# Altium PCB sigjumper-bottom.PcbDoc (part 3 of 5)
Units mil, origin at the board's own origin, x right, y up, seen from the top; angles counter-clockwise.
Board outline 7874.02 x 2559.06 mil, 14 copper layers (TOP, P1(GND), S1(V), P2(GND), S2(H), P3(GND), S3(V12/V2V5), S4(VDDR), P4(GND), S5(V), P5(GND), S6(H), P6(GND), BOT), stack 115.1 mil thick; 22 components, 186 nets, 824 pads, 732 vias.
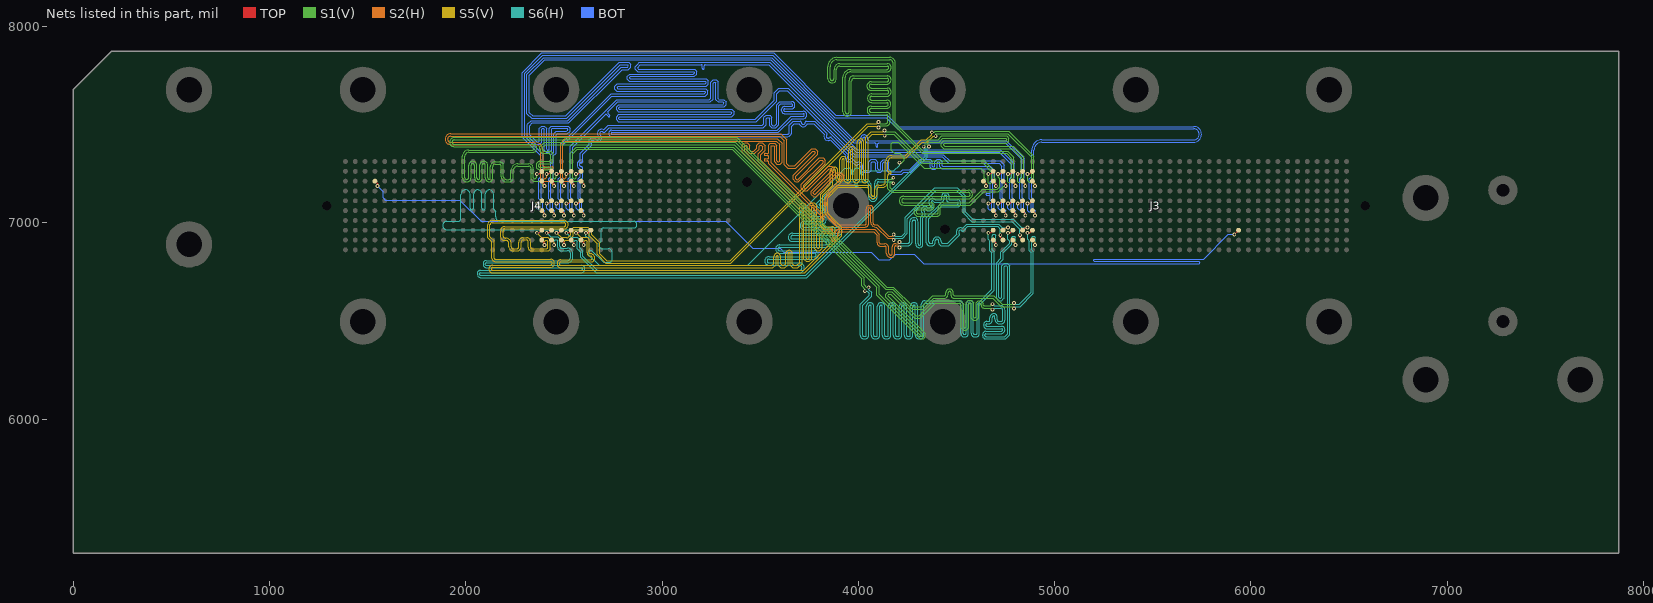
[diagram p15: the nets of this part, all layers, seen from the top]

## Via types
v1: diameter 19, hole 10, TOP to BOT, tented both sides, 732 vias

## Nets (pads, with @x,y where several pads share a name; then routed paths per layer and width w, separated by ;. In a path a pad name is that pad's centre, name@x,y a point inside that pad or via, vN(x,y) a via of type N, cw(c..) or ccw(c..) an arc to the next point about the centre after c; other vN are vias at no path point) (continued)
IL0.TB.G13.D6: J3.118 J4.38 | length 5779.3
  TOP w4: J4.38@1537.2,7211.61 1550.7,7198.11 v1(1550.7,7186.61) ; v1(5915.2,6940) J3.118@5936.81,6961.61
  BOT w4: v1(1550.7,7186.61) 1578.74,7158.58 1578.74,7126.81 1590.55,7115 1970,7115 2078,7007 3323.88,7007 3461.88,6869 3601,6869 3621,6849 4066,6849 4105,6810 4160,6810 4190,6840 4285,6840 4334,6791 5736,6791 5739.17,6794.17 5739.17,6797.24 5733.42,6803 5201.92,6803 5199.8,6805.12 5199.8,6812.01 5201.77,6813.98 5758.98,6813.98 5885,6940 v1(5915.2,6940)
IL1.LR.G0.D0_N: J3.323 J4.203 | length 5847.7
  TOP w4: v1(2362.2,6948.11) 2373.7,6948.11 J4.203@2387.2,6961.61 ; J3.323@4886.81,7211.61 4900.31,7198.11 v1(4900.31,7186.61)
  S1(V) w4: v1(4374,7460.31) 4385.31,7460.31 4391,7466 4765.97,7466 4894.29,7337.68 4894.29,7204.14 4900.31,7198.11 v1(4900.31,7186.61)
  S5(V) w4: v1(2362.2,6948.11) 2385.59,6924.73 2417.91,6924.73 2429.91,6912.73 2429.91,6869.03 cw(c2416.88,6869.03) 2416.88,6856 2336,6856 cw(c2336,6874) 2318,6874 2318,6904 ccw(c2310,6904) 2310,6912 2293,6912 ccw(c2293,6901) 2282,6901 2282,6877 cw(c2261,6877) 2261,6856 2241,6856 cw(c2241,6878) 2219,6878 2219,6895 ccw(c2204,6895) 2204,6910 2195.03,6910 cw(c2195.03,6927.03) 2178,6927.03 2178,6960 cw(c2198,6960) 2198,6980 2500,6980 ccw(c2500,6990) 2510,6990 ccw(c2500,6990) 2500,7000 2135,7000 ccw(c2135,6988.49) 2123.49,6988.49 2123.49,6928.49 2145,6906.97 2145,6820 ccw(c2151,6820) 2151,6814 2432,6814 cw(c2432,6794) 2452,6794 cw(c2430,6794) 2430,6772 2138,6772 ccw(c2138,6764) 2130,6764 ccw(c2137,6764) 2137,6757 3721.38,6757 3903,6938.62 3903,6971.71 3831.71,7043 3831.71,7130.23 3893.39,7191.91 4050,7191.91 cw(c4050,7176.91) 4065,7176.91 4065,7145 ccw(c4075,7145) 4075,7135 ccw(c4075,7143) 4083,7143 4083,7169.91 cw(c4105,7169.91) 4105,7191.91 4120,7191.91 ccw(c4120,7209.91) 4138,7209.91 ; 4138,7208 4138,7310 cw(c4170,7310) 4170,7342 4240.03,7342 4320.03,7422 4347,7422 4374,7449 v1(4374,7460.31)
IL1.LR.G0.D0_P: J3.322 J4.202 | length 5846.8
  TOP w4: J4.202@2387.2,6911.61 2400.7,6898.11 v1(2400.7,6886.61) ; v1(4861.81,7248.11) 4873.31,7248.11 J3.322@4886.81,7261.61
  S1(V) w4: v1(4393.8,7440.51) 4393.8,7451.83 4395.97,7454 4761,7454 4882.29,7332.71 4882.29,7209.29 4878,7205 4870,7205 4861.81,7213.19 v1(4861.81,7248.11)
  S5(V) w4: v1(2400.7,6886.61) 2400.7,6902.52 2407.91,6909.73 2412.91,6909.73 2417.91,6904.73 2417.91,6874 cw(c2411.91,6874) 2411.91,6868 2336,6868 cw(c2336,6874) 2330,6874 2330,6904 ccw(c2310,6904) 2310,6924 2293,6924 ccw(c2293,6901) 2270,6901 2270,6877 cw(c2261,6877) 2261,6868 2241,6868 cw(c2241,6878) 2231,6878 2231,6895 ccw(c2204,6895) 2204,6922 2200,6922 cw(c2200,6932) 2190,6932 2190,6960 cw(c2198,6960) 2198,6968 2500,6968 ccw(c2500,6990) 2522,6990 ccw(c2500,6990) 2500,7012 2135,7012 ccw(c2135,6988.49) 2111.49,6988.49 2111.49,6923.51 2115,6920 2133,6902 2133,6820 ccw(c2151,6820) 2151,6802 2432,6802 cw(c2432,6794) 2440,6794 cw(c2430,6794) 2430,6784 2138,6784 ccw(c2138,6764) 2118,6764 ccw(c2137,6764) 2137,6745 3726.35,6745 3915,6933.65 3915,6976.68 3843.71,7047.97 3843.71,7125.26 3898.36,7179.91 4045.03,7179.91 cw(c4045.03,7171.94) 4053,7171.94 4053,7145 ccw(c4075,7145) 4075,7123 ccw(c4075,7143) 4095,7143 4095,7169.91 cw(c4105,7169.91) 4105,7179.91 4120,7179.91 ccw(c4120,7209.91) 4150,7209.91 ; 4150,7208 4150,7240 cw(c4160,7240) 4160,7250 4162,7250 ccw(c4162,7255) 4167,7255 ccw(c4162,7255) 4162,7260 4155,7260 cw(c4155,7265) 4150,7265 4150,7310 cw(c4170,7310) 4170,7330 4245,7330 4325,7410 4351.97,7410 4382.49,7440.51 v1(4393.8,7440.51)
IL1.LR.G0.D1_N: J3.326 J4.206 | length 5775.1
  TOP w4: v1(2362.2,7098.11) 2373.7,7098.11 J4.206@2387.2,7111.61 ; J3.326@4886.81,7061.61 4900.31,7048.11 v1(4900.31,7036.61)
  BOT w4: v1(2362.2,7098.11) 2362.2,7072.8 2370,7065 2375,7065 2380,7070 2380,7115 2372,7123 2372,7223.97 2383,7234.97 2383,7340.03 2288,7435.03 2288,7764.97 2388.03,7865 3567.88,7865 3885.88,7547 4148,7547 4205,7490 5708,7490 cw(c5708,7450) 5748,7450 cw(c5708,7450) 5708,7410 4935.09,7410 ccw(c4935.09,7369.52) 4894.61,7369.52 4894.61,7230 4883.61,7219 4883.61,7127.97 4891.61,7119.97 4891.61,7070 4900.31,7061.3 v1(4900.31,7036.61)
IL1.LR.G0.D1_P: J3.325 J4.205 | length 5757.9
  TOP w4: J4.205@2387.2,7061.61 2400.7,7048.11 v1(2400.7,7036.61) ; v1(4861.81,7098.11) 4873.31,7098.11 J3.325@4886.81,7111.61
  BOT w4: v1(2400.7,7036.61) 2400.7,7061.3 2392,7070 2392,7119.97 2384,7127.97 2384,7219 2395,7230 2395,7345 2300,7440 2300,7760 2393,7853 3562.91,7853 3880.91,7535 4143.03,7535 4200.03,7478 5708,7478 cw(c5708,7450) 5736,7450 cw(c5708,7450) 5708,7422 4935.1,7422 ccw(c4935.1,7369.5) 4882.61,7369.5 4882.61,7234.97 4871.61,7223.97 4871.61,7123 4879.61,7115 4879.61,7060 4874.61,7055 4867,7055 4861.81,7060.19 v1(4861.81,7098.11)
IL1.LR.G0.D2_N: J3.329 J4.209 | length 5796.6
  TOP w4: v1(2362.2,7248.11) 2373.7,7248.11 J4.209@2387.2,7261.61 ; J3.329@4886.81,6911.61 4900.31,6898.11 v1(4900.31,6886.61)
  S1(V) w4: v1(2362.2,7248.11) 2362.2,7232.2 2355,7225 2350,7225 2345,7230 2345,7275 ccw(c2320,7275) 2320,7300 2265,7300 ccw(c2265,7265) 2230,7265 2230,7230 cw(c2220,7230) 2220,7220 2207,7220 cw(c2207,7235) 2192,7235 2192,7290 ccw(c2172,7290) 2172,7310 2150,7310 ccw(c2150,7285) 2125,7285 2125,7225 cw(c2120,7225) 2120,7220 cw(c2120,7228) 2112,7228 2112,7293 ccw(c2093,7293) 2093,7312 2090,7312 ccw(c2090,7294) 2072,7294 2072,7227 cw(c2065,7227) 2065,7220 cw(c2065,7228) 2057,7228 2057,7290 ccw(c2035,7290) 2035,7312 ccw(c2035,7292) 2015,7292 2015,7230 cw(c2005,7230) 2005,7220 cw(c2005,7230) 1995,7230 1995,7338 cw(c2015,7338) 2015,7358 2340,7358 ccw(c2340,7380) 2362,7380 ccw(c2342,7380) 2342,7400 1940,7400 cw(c1940,7410) 1930,7410 cw(c1942,7410) 1942,7422 3376.73,7422 4138.76,6659.97 4173.97,6659.97 4274.94,6559 4327.03,6559 4384.03,6616 4438,6616 ccw(c4438,6635) 4457,6635 4457,6642 cw(c4465,6642) 4465,6650 cw(c4465,6643) 4472,6643 4472,6629.03 ccw(c4485.03,6629.03) 4485.03,6616 4684,6616 4728.51,6571.49 4785,6571.49 v1(4793,6563.49)
  S6(H) w4: v1(4793,6563.49) 4801,6571.49 4823.46,6571.49 4892,6640.03 4892,6853 4882.12,6862.88 4882.12,6924.73 4887.12,6929.73 4897.12,6929.73 4900.31,6926.54 v1(4900.31,6886.61)
IL1.LR.G0.D2_P: J3.328 J4.208 | length 5811
  TOP w4: J4.208@2387.2,7211.61 2400.7,7198.11 v1(2400.7,7186.61) ; v1(4861.81,6948.11) 4873.31,6948.11 J3.328@4886.81,6961.61
  S1(V) w4: v1(2400.7,7186.61) 2377.32,7210 2345,7210 2333,7222 2333,7275 ccw(c2320,7275) 2320,7288 2265,7288 ccw(c2265,7265) 2242,7265 2242,7230 cw(c2220,7230) 2220,7208 2207,7208 cw(c2207,7235) 2180,7235 2180,7290 ccw(c2172,7290) 2172,7298 2150,7298 ccw(c2150,7285) 2137,7285 2137,7225 cw(c2120,7225) 2120,7208 cw(c2120,7228) 2100,7228 2100,7293 ccw(c2093,7293) 2093,7300 2090,7300 ccw(c2090,7294) 2084,7294 2084,7227 cw(c2065,7227) 2065,7208 cw(c2065,7228) 2045,7228 2045,7290 ccw(c2035,7290) 2035,7300 ccw(c2035,7292) 2027,7292 2027,7230 cw(c2005,7230) 2005,7208 cw(c2005,7230) 1983,7230 1983,7338 cw(c2015,7338) 2015,7370 2340,7370 ccw(c2340,7380) 2350,7380 ccw(c2342,7380) 2342,7388 1940,7388 cw(c1940,7410) 1918,7410 cw(c1942,7410) 1942,7434 3381.7,7434 4143.73,6671.97 4178.94,6671.97 4279.91,6571 4322.06,6571 4379.06,6628 4438,6628 ccw(c4438,6635) 4445,6635 4445,6642 cw(c4465,6642) 4465,6662 cw(c4465,6643) 4484,6643 4484,6634 ccw(c4490,6634) 4490,6628 4688.97,6628 4693.49,6623.49 4733.49,6583.49 4785,6583.49 v1(4793,6591.49)
  S6(H) w4: v1(4793,6591.49) 4801,6583.49 4818.49,6583.49 4880,6645 4880,6848.03 4870.12,6857.91 4870.12,6906.73 4861.81,6915.04 v1(4861.81,6948.11)
IL1.LR.G0.D3_N: J3.333 J4.213 | length 5814.7
  TOP w4: v1(2412.2,6948.11) 2423.7,6948.11 J4.213@2437.2,6961.61 ; J3.333@4836.81,7211.61 4850.31,7198.11 v1(4850.31,7186.61)
  S1(V) w4: v1(4332.5,7387.5) 4340,7395 4340,7407.97 4355.03,7423 4406.03,7423 4425.03,7442 4754.97,7442 4767,7429.97 4767,7415.03 4756.97,7405 4440,7405 4435,7400 4435,7395 4441,7389 4787.97,7389 4842,7334.97 4842,7207 4850.31,7198.69 v1(4850.31,7186.61)
  S6(H) w4: v1(2412.2,6948.11) 2432.32,6928 2469,6928 2479.91,6917.09 2479.91,6879 ccw(c2488.91,6879) 2488.91,6870 2518,6870 cw(c2518,6842) 2546,6842 2546,6824 cw(c2517,6824) 2517,6795 2105,6795 ccw(c2105,6790) 2100,6790 2100,6787 ccw(c2105,6787) 2105,6782 2590,6782 cw(c2590,6765) 2607,6765 cw(c2587,6765) 2587,6745 2075,6745 ccw(c2075,6740) 2070,6740 2070,6737 ccw(c2075,6737) 2075,6732 3733,6732 4340,7339 4340,7380 v1(4332.5,7387.5)
IL1.LR.G0.D3_P: J3.332 J4.212 | length 5801.8
  TOP w4: J4.212@2437.2,6911.61 2450.7,6898.11 v1(2450.7,6886.61) ; v1(4811.81,7248.11) 4823.31,7248.11 J3.332@4836.81,7261.61
  S1(V) w4: v1(4359.5,7388.5) 4352,7396 4352,7403 4360,7411 4411,7411 4430,7430 4750,7430 4755,7425 4755,7420 4752,7417 4435.03,7417 4423,7404.97 4423,7390.03 4436.03,7377 4783,7377 4830,7330 4830,7210 4825,7205 4815,7205 4811.81,7208.19 v1(4811.81,7248.11)
  S6(H) w4: v1(2450.7,6886.61) 2450.7,6908.7 2455,6913 2463.64,6913 2467.91,6908.73 2467.91,6874.03 ccw(c2483.94,6874.03) 2483.94,6858 2518,6858 cw(c2518,6842) 2534,6842 2534,6824 cw(c2517,6824) 2517,6807 2105,6807 ccw(c2105,6790) 2088,6790 ccw(c2108,6790) 2108,6770 2590,6770 cw(c2590,6765) 2595,6765 cw(c2587,6765) 2587,6757 2075,6757 ccw(c2075,6740) 2058,6740 ccw(c2078,6740) 2078,6720 3737.97,6720 4352,7334.03 4352,7381 v1(4359.5,7388.5)
IL1.LR.G0.D4_N: J3.336 J4.216 | length 5774.7
  TOP w4: v1(2412.2,7098.11) 2423.7,7098.11 J4.216@2437.2,7111.61 ; J3.336@4836.81,7061.61 4850.31,7048.11 v1(4850.31,7036.61)
  BOT w4: v1(2412.2,7098.11) 2412.2,7072.8 2420,7065 2425,7065 2430,7070 2430,7115 2422,7123 2422,7223.97 2433,7234.97 2433,7344.97 2448,7359.97 2448,7452.97 2460.03,7465 2513.03,7465 2520,7471.97 2520,7476.03 2516.03,7480 2440,7480 2437,7477 2437,7370.03 2424.97,7358 2410.03,7358 2400,7368.03 2400,7475 2395,7480 2392,7480 2387,7475 2387,7410.03 2376.94,7399.97 2357,7399.97 2313,7443.97 2313,7499.97 2316.51,7503.49 2333.03,7520 2520,7520 2792.68,7792.68 2824.39,7792.68 2827.93,7796.21 2827.93,7803.28 2825.79,7805.43 2787.4,7805.43 2513.47,7531.5 2335.53,7531.5 2312,7555.03 2312,7755.03 2397.97,7841 3557.94,7841 3980.94,7418 4003,7418 ccw(c4003,7425) 4010,7425 4010,7427 cw(c4030,7427) 4030,7447 cw(c4030,7430) 4047,7430 4047,7426 ccw(c4055,7426) 4055,7418 4753.97,7418 4844.61,7327.36 4844.61,7230 4833.61,7219 4833.61,7127.97 4841.61,7119.97 4841.61,7058.39 4850.31,7049.69 v1(4850.31,7036.61)
IL1.LR.G0.D4_P: J3.335 J4.215 | length 5770
  TOP w4: J4.215@2437.2,7061.61 2450.7,7048.11 v1(2450.7,7036.61) ; v1(4811.81,7098.11) 4823.31,7098.11 J3.335@4836.81,7111.61
  BOT w4: v1(2450.7,7036.61) 2450.7,7061.3 2442,7070 2442,7119.97 2434,7127.97 2434,7219 2445,7230 2445,7340 2460,7355 2460,7448 2465,7453 2518,7453 2532,7467 2532,7481 2521,7492 2435.03,7492 2425,7481.97 2425,7375 2420,7370 2415,7370 2412,7373 2412,7479.97 2399.97,7492 2387.03,7492 2375,7479.97 2375,7415 2371.97,7411.97 2361.97,7411.97 2325,7448.94 2325,7495 2338,7508 2524.97,7508 2796.82,7779.85 2828.54,7779.85 2839.93,7791.24 2839.93,7808.25 2830.76,7817.43 2782.43,7817.43 2508.5,7543.5 2340.5,7543.5 2324,7560 2324,7750.06 2402.94,7829 3552.97,7829 3975.97,7406 4003,7406 ccw(c4003,7425) 4022,7425 4022,7427 cw(c4030,7427) 4030,7435 cw(c4030,7430) 4035,7430 4035,7421.03 ccw(c4050.03,7421.03) 4050.03,7406 4084,7406 cw(c4084,7400) 4090,7400 4090,7390 ccw(c4095,7390) 4095,7385 ccw(c4095,7390) 4100,7390 4100,7401 cw(c4105,7401) 4105,7406 4749,7406 4832.61,7322.39 4832.61,7234.97 4821.61,7223.97 4821.61,7123 4829.61,7115 4829.61,7070 4824.61,7065 4819.61,7065 4811.81,7072.8 v1(4811.81,7098.11)
IL1.LR.G0.S_N: J3.339 J4.219 | length 5818.4
  TOP w4: v1(2412.2,7248.11) 2423.7,7248.11 J4.219@2437.2,7261.61 ; v1(4823.31,6936.61) 4823.31,6925.11 J3.339@4836.81,6911.61
  S2(H) w4: v1(2412.2,7248.11) 2412.2,7232.2 2405,7225 2400,7225 2395,7230 2395,7270 cw(c2400,7270) 2400,7275 2440,7275 ccw(c2440,7280) 2445,7280 ccw(c2440,7280) 2440,7285 2400,7285 cw(c2400,7290) 2395,7290 2395,7365 ccw(c2350,7365) 2350,7410 1922,7410 cw(c1922,7425) 1907,7425 cw(c1922.54,7425) 1922.54,7440.54 3599.54,7440.54 3623,7417.09 3623,7295.03 3640.03,7278 3679.97,7278 3766.97,7365 3775,7365 3780,7360 3780,7352.6 3668,7240.6 3668,7220.03 3676.51,7211.51 3680.03,7208 3694.97,7208 3804.97,7318 3815,7318 3820,7313 3820,7305 3710,7195 3710,7175.03 3722.03,7163 3739.97,7163 3758.49,7181.51 3851.97,7275 3860,7275 3865,7270 3865,7265 3762.5,7162.5 3758.99,7158.99 3758.99,7144.04 3762.5,7140.53 3766.51,7136.51 3770.03,7133 3784.97,7133 3894.97,7243 3904.27,7243 3913,7234.27 3913,7224.97 3852.72,7164.69 ccw(c3912.43,7105) 3828,7105 3828,7086.42 ccw(c3940,7086.42) 3860.8,7007.23 3876.51,6991.51 ccw(c3909.14,7024.14) 3909.14,6978 4035,6978 ccw(c4035,6995) 4052,6995 4052,7072 cw(c4055,7072) 4055,7075 4061,7075 cw(c4061,7073) 4063,7073 4063,7002.97 ccw(c4087.97,7002.97) 4087.97,6978 4092.03,6978 4150.03,6920 4172,6920 v1(4180,6912)
  S6(H) w4: v1(4180,6912) 4188,6920 4225,6920 4250,6945 4250,7020 4396,7166 4499,7166 4533,7132 4533,7050.03 4578.03,7005 4784.94,7005 4823.31,6966.63 v1(4823.31,6936.61)
IL1.LR.G0.S_P: J3.338 J4.218 | length 5814.2
  TOP w4: J4.218@2437.2,7211.61 2450.7,7198.11 v1(2450.7,7186.61) ; J3.338@4836.81,6961.61 4850.31,6975.11 v1(4861.81,6975.11)
  S2(H) w4: v1(2450.7,7186.61) 2427.32,7210 2395,7210 2383,7222 2383,7365 ccw(c2350,7365) 2350,7398 1922,7398 cw(c1922,7425) 1895,7425 cw(c1922.54,7425) 1922.54,7452.54 3604.52,7452.54 3635,7422.06 3635,7300 3645,7290 3675,7290 3762,7377 3779.97,7377 3792,7364.97 3792,7347.63 3680,7235.63 3680,7225 3685,7220 3690,7220 3800,7330 3819.97,7330 3832,7317.97 3832,7300.03 3722,7190.03 3722,7180 3727,7175 3735,7175 3847,7287 3864.97,7287 3877,7274.97 3877,7260.03 3770.99,7154.01 3770.99,7149.01 3775,7145 3780,7145 3890,7255 3909.24,7255 3925,7239.24 3925,7220 3861.21,7156.21 ccw(c3912.43,7105) 3840,7105 3840,7086.42 ccw(c3940,7086.42) 3869.29,7015.71 3885,7000 ccw(c3909.14,7024.14) 3909.14,6990 4035,6990 ccw(c4035,6995) 4040,6995 4040,7072 cw(c4055,7072) 4055,7087 4061,7087 cw(c4061,7073) 4075,7073 4075,6998 ccw(c4083,6998) 4083,6990 4097,6990 4155,6932 4172,6932 v1(4180,6940)
  S6(H) w4: v1(4180,6940) 4188,6932 4220.03,6932 4238,6949.97 4238,7026.97 ; 4238.03,7027 4238.03,7028.06 4388.97,7179 4502.99,7178.99 4545,7136.97 4545,7055 4583,7017 4789.91,7017 4831.8,6975.11 v1(4861.81,6975.11)
IL1.LR.G1.D0_N: J3.343 J4.223 | length 5847.5
  TOP w4: v1(2462.2,6948.11) 2473.7,6948.11 J4.223@2487.2,6961.61 ; J3.343@4786.81,7211.61 4800.31,7198.11 v1(4800.31,7186.61)
  S1(V) w4: 3888,7783 3888,7780 ; v1(4103,7513) 4111,7505 4140,7505 ccw(c4140,7515) 4150,7515 4150,7545 ccw(c4145,7545) 4145,7550 4130,7550 4066,7550 cw(c4066,7572) 4044,7572 cw(c4066,7572) 4066,7594 4143,7594 ccw(c4143,7604) 4153,7604 ccw(c4145,7604) 4145,7612 4068,7612 cw(c4068,7634) 4046,7634 cw(c4068,7634) 4068,7656 4145,7656 ccw(c4145,7666) 4155,7666 ccw(c4147,7666) 4147,7674 4065,7674 cw(c4065,7696) 4043,7696 cw(c4065,7696) 4065,7718 4145,7718 ccw(c4145,7728) 4155,7728 ccw(c4147,7728) 4147,7736 3980,7736 ccw(c3980,7721) 3965,7721 3965,7565 cw(c3943,7565) 3943,7543 cw(c3943,7565) 3921,7565 3921,7740 cw(c3961,7740) 3961,7780 4145,7780 ccw(c4145,7790) 4155,7790 ccw(c4147,7790) 4147,7798 3906,7798 ccw(c3906,7780) 3888,7780 ; v1(4800.31,7186.61) 4800.31,7197.69 4792,7206 4792,7333 4760,7365 4330,7365 4189,7506 4189,7812 ccw(c4159,7812) 4159,7842 3891,7842 ccw(c3891,7795) 3844,7795 3844,7734 ccw(c3866,7734) 3866,7712 ccw(c3866,7734) 3888,7734 3888,7780
  S5(V) w4: v1(2462.2,6948.11) 2485.59,6924.73 2512.91,6924.73 2514.41,6923.23 2520,6923.23 2534.49,6937.72 2534.49,6961.46 2550.03,6977 2622.51,6977 2642,6957.51 2642,6938 2682,6898 2682,6843 2719,6806 3346.15,6806 4044.15,7504 4094,7504 v1(4103,7513)
IL1.LR.G1.D0_P: J3.342 J4.222 | length 5832.3
  TOP w4: J4.222@2487.2,6911.61 2500.7,6898.11 v1(2500.7,6886.61) ; v1(4761.81,7248.11) 4773.31,7248.11 J3.342@4786.81,7261.61
  S1(V) w4: v1(4103,7485) 4111,7493 4140,7493 ccw(c4140,7515) 4162,7515 4162,7545 ccw(c4145,7545) 4145,7562 4066,7562 cw(c4066,7572) 4056,7572 cw(c4066,7572) 4066,7582 4143,7582 ccw(c4143,7604) 4165,7604 ccw(c4145,7604) 4145,7624 4068,7624 cw(c4068,7634) 4058,7634 cw(c4068,7634) 4068,7644 4145,7644 ccw(c4145,7666) 4167,7666 ccw(c4147,7666) 4147,7686 4065,7686 cw(c4065,7696) 4055,7696 cw(c4065,7696) 4065,7706 4145,7706 ccw(c4145,7728) 4167,7728 ccw(c4147,7728) 4147,7748 3975.03,7748 ccw(c3975.03,7725.97) 3953,7725.97 3953,7565 cw(c3943,7565) 3943,7555 cw(c3943,7565) 3933,7565 3933,7740 cw(c3961,7740) 3961,7768 4145,7768 ccw(c4145,7790) 4167,7790 ccw(c4147,7790) 4147,7810 3906,7810 ccw(c3906,7780) 3876,7780 3876,7734 cw(c3866,7734) 3866,7724 cw(c3866,7734) 3856,7734 3856,7795 cw(c3891,7795) 3891,7830 4159,7830 cw(c4159,7812) 4177,7812 4177,7501.03 4325.03,7353 4755.03,7353 4780,7328.03 4780,7210 4775,7205 4765,7205 4761.81,7208.19 v1(4761.81,7248.11)
  S5(V) w4: v1(2500.7,6886.61) 2500.7,6902.52 2507.91,6909.73 2512.91,6909.73 2514.41,6911.23 2524.97,6911.23 2546.49,6932.75 2546.49,6956.49 2555,6965 2617.54,6965 2630,6952.54 2630,6933.03 2670,6893.03 2670,6838.03 2714.03,6794 3351.12,6794 4049.12,7492 4096,7492 v1(4103,7485)
IL1.LR.G1.D1_N: J3.346 J4.226 | length 5774
  TOP w4: v1(2462.2,7098.11) 2473.7,7098.11 J4.226@2487.2,7111.61 ; J3.346@4786.81,7061.61 4800.31,7048.11 v1(4800.31,7036.61)
  BOT w4: v1(2462.2,7098.11) 2462.2,7075.8 2470,7068 2475,7068 2480,7073 2480,7115 2472,7123 2472,7223.97 2483,7234.97 2483,7399.97 2740.03,7657 3215.03,7657 3220.03,7662 3220.03,7667 3217.03,7670 2770,7670 2759.97,7680.03 2759.97,7694.97 2772,7707 3219.03,7707 3223,7710.97 3223,7718.03 3221.03,7720 2833.03,7720 2823,7730.03 2823,7744.97 2835.03,7757 3160.03,7757 3165.03,7762 3165.03,7767 3162.03,7770 2875,7770 2863,7782 2863,7794.97 2875.03,7807 2885.03,7817 3548,7817 3993.21,7371.79 4723.21,7371.79 4794.29,7300.71 4794.29,7229.68 4783.61,7219 4783.61,7127.97 4791.61,7119.97 4791.61,7070 4800.31,7061.3 v1(4800.31,7036.61)
IL1.LR.G1.D1_P: J3.345 J4.225 | length 5776.9
  TOP w4: J4.225@2487.2,7061.61 2500.7,7048.11 v1(2500.7,7036.61) ; v1(4761.81,7098.11) 4773.31,7098.11 J3.345@4786.81,7111.61
  BOT w4: v1(2500.7,7036.61) 2500.7,7061.3 2492,7070 2492,7119.97 2484,7127.97 2484,7219 2495,7230 2495,7395 2745,7645 3220,7645 3232.03,7657.03 3232.03,7671.97 3222,7682 2774.97,7682 2771.97,7685 2771.97,7690 2776.97,7695 3224,7695 3235,7706 3235,7723 3226,7732 2838,7732 2835,7735 2835,7740 2840,7745 3165,7745 3177.03,7757.03 3177.03,7771.97 3167,7782 2879.97,7782 2875,7786.97 2875,7790 2890,7805 3200,7805 cw(c3200,7800) 3205,7800 3205,7787.4 ccw(c3210,7787.4) 3210,7782.4 ccw(c3210,7787.4) 3215,7787.4 3215,7800 cw(c3220,7800) 3220,7805 3543.03,7805 3988.24,7359.79 4718.24,7359.79 4782.29,7295.74 4782.29,7234.65 4771.61,7223.97 4771.61,7123 4779.61,7115 4779.61,7070 4774.61,7065 4769.61,7065 4761.81,7072.8 v1(4761.81,7098.11)
IL1.LR.G1.D2_N: J3.349 J4.229 | length 5796.9
  TOP w4: v1(2462.2,7248.11) 2473.7,7248.11 J4.229@2487.2,7261.61 ; J3.349@4786.81,6911.61 4800.31,6898.11 v1(4800.31,6886.61)
  S1(V) w4: v1(2462.2,7248.11) 2462.2,7232.2 2455,7225 2450,7225 2445,7230 2445,7257 ccw(c2420,7257) 2420,7282 2378,7282 cw(c2378,7290) 2370,7290 cw(c2380,7290) 2380,7300 2425,7300 ccw(c2425,7320) 2445,7320 2445,7345 ccw(c2425,7345) 2425,7365 2400,7365 cw(c2400,7375) 2390,7375 2390,7381.06 2406.94,7398 3366.79,7398 4094.9,6669.9 4094.9,6630.1 4315,6410 4332.01,6410 4341.16,6419.15 4341.16,6436.16 4151,6626.33 4151,6630 4156,6635 4165,6635 4287,6513 4314.97,6513 4391.97,6590 4515,6590 4525,6580 4525,6463.03 4531.51,6456.51 4535.03,6453 4549.97,6453 4562,6465.03 4562,6589 4565,6592 4570,6592 4575,6587 4575,6513.03 4581.51,6506.51 4585.03,6503 4599.97,6503 4608.49,6511.51 4612,6515.03 4612,6587 4615,6590 4620,6590 4625,6585 4625,6580 ccw(c4640,6580) 4640,6565 4675,6565 v1(4683,6557)
  S6(H) w4: v1(4683,6557) 4691,6565 4700.5,6565 4725,6565 cw(c4725,6555) 4735,6555 4735,6505 cw(c4727,6505) 4727,6497 4715,6497 cw(c4715,6505) 4707,6505 4707,6520 ccw(c4690,6520) 4690,6537 ccw(c4690,6517) 4670,6517 4670,6502 cw(c4665,6502) 4665,6497 4655,6497 ccw(c4655,6480) 4638,6480 4638,6477 ccw(c4655,6477) 4655,6460 4730,6460 cw(c4730,6455) 4735,6455 cw(c4727,6455) 4727,6447 4650,6447 ccw(c4650,6430) 4633,6430 4633,6425 ccw(c4650,6425) 4650,6408 4749.97,6408 4772,6430.03 4772,6779.97 4761.97,6790 4758.46,6793.51 4743.51,6793.51 4740,6790 4730,6780 4730,6620 4725,6615 4720,6615 4716,6619 4716,6791 4738.49,6813.49 4738.49,6846.51 4782.12,6890.15 4782.12,6924.73 4787.12,6929.73 4797.12,6929.73 4800.31,6926.54 v1(4800.31,6886.61)
IL1.LR.G1.D2_P: J3.348 J4.228 | length 5811.2
  TOP w4: J4.228@2487.2,7211.61 2500.7,7198.11 v1(2500.7,7186.61) ; v1(4761.81,6948.11) 4773.31,6948.11 J3.348@4786.81,6961.61
  S1(V) w4: v1(2500.7,7186.61) 2477.32,7210 2445,7210 2433,7222 2433,7257 ccw(c2420,7257) 2420,7270 2378,7270 cw(c2378,7290) 2358,7290 cw(c2380,7290) 2380,7312 2425,7312 ccw(c2425,7320) 2433,7320 2433,7340 ccw(c2420,7340) 2420,7353 2400,7353 cw(c2400,7375) 2378,7375 2378,7386.03 2401.97,7410 3371.76,7410 4103.38,6678.38 4106.9,6674.87 4106.9,6635.07 4319.97,6422 4327.04,6422 4329.16,6424.12 4329.16,6431.19 4139,6621.36 4139,6634.97 4149.51,6645.49 4151.03,6647 4169.97,6647 4291.97,6525 4310,6525 4387,6602 4519.97,6602 4537,6584.97 4537,6468 4540,6465 4545,6465 4550,6470 4550,6593.97 4556.51,6600.49 4560.03,6604 4574.97,6604 4587,6591.97 4587,6518 4590,6515 4595,6515 4600,6520 4600,6591.97 4610.03,6602 4624.97,6602 4637,6589.97 4637,6580 ccw(c4640,6580) 4640,6577 4675,6577 v1(4683,6585)
  S6(H) w4: v1(4683,6585) 4691,6577 4725,6577 cw(c4725,6555) 4747,6555 4747,6505 cw(c4727,6505) 4727,6485 4719.97,6485 cw(c4719.97,6509.97) 4695,6509.97 4695,6520 ccw(c4690,6520) 4690,6525 ccw(c4690,6517) 4682,6517 4682,6502 cw(c4665,6502) 4665,6485 4655,6485 ccw(c4655,6480) 4650,6480 4650,6477 ccw(c4655,6477) 4655,6472 4730,6472 cw(c4730,6455) 4747,6455 cw(c4727,6455) 4727,6435 4650,6435 ccw(c4650,6430) 4645,6430 4645,6425 ccw(c4650,6425) 4650,6420 4745,6420 4760,6435 4760,6775 4753.49,6781.51 4748.49,6781.51 4742,6775.03 4742,6615.03 4738.49,6611.51 4729.97,6603 4715.03,6603 4704,6614.03 4704,6795.97 4726.49,6818.46 4726.49,6851.49 4730,6855 4770.12,6895.12 4770.12,6906.73 4761.81,6915.04 v1(4761.81,6948.11)
IL1.LR.G1.D3_N: J3.353 J4.233 | length 5810.9
  TOP w4: v1(2512.2,6948.11) 2523.7,6948.11 J4.233@2537.2,6961.61 ; J3.353@4736.81,7211.61 4750.31,7198.11 v1(4750.31,7186.61)
  S1(V) w4: v1(4178,7229) 4170,7221 4161,7221 4150,7210 4150,7173.03 4169.03,7154 4560,7154 cw(c4560,7144) 4560,7134 4230,7134 ccw(c4230,7112) 4230,7090 4370,7090 cw(c4370,7085) 4375,7085 cw(c4367,7085) 4367,7077 4305,7077 ccw(c4305,7055) 4283,7055 ccw(c4305,7055) 4305,7033 4400,7033 ccw(c4400,7051) 4418,7051 4418,7075 cw(c4433,7075) 4433,7090 4570.97,7090 4638.97,7158 4713,7158 4741.61,7186.61 v1(4750.31,7186.61)
  S6(H) w4: v1(2512.2,6948.11) 2535.59,6924.73 2567.91,6924.73 2579.91,6912.73 2579.91,6872.06 2597,6854.97 2597,6830 2670,6757 3700,6757 ccw(c3700,6770) 3713,6770 ccw(c3700,6770) 3700,6783 3545,6783 cw(c3545,6805) 3523,6805 cw(c3545,6805) 3545,6827 3777,6827 ccw(c3777,6835) 3785,6835 ccw(c3775,6835) 3775,6845 3598,6845 cw(c3598,6865) 3578,6865 cw(c3600,6865) 3600,6887 3832,6887 ccw(c3832,6895) 3840,6895 ccw(c3830,6895) 3830,6905 3663,6905 cw(c3663,6925) 3643,6925 cw(c3665,6925) 3665,6947 3897,6947 ccw(c3897,6955) 3905,6955 ccw(c3895,6955) 3895,6965 3723,6965 cw(c3723,6985) 3703,6985 cw(c3725,6985) 3725,7007 3817,7007 ccw(c3817,7015) 3825,7015 ccw(c3820,7015) 3820,7020 3778,7020 cw(c3778,7040) 3758,7040 cw(c3780,7040) 3780,7062 3817,7062 ccw(c3817,7070) 3825,7070 ccw(c3820,7070) 3820,7075 3805,7075 cw(c3805,7092) 3788,7092 3788,7099.97 ; 3788,7100.12 3908.88,7221 4034,7221 cw(c4034,7190) 4065,7190 4065,7130 ccw(c4075,7130) 4075,7120 ccw(c4075,7128) 4083,7128 4083,7202 cw(c4102,7202) 4102,7221 4170,7221 v1(4178,7229)
IL1.LR.G1.D3_P: J3.352 J4.232 | length 5812.3
  TOP w4: J4.232@2537.2,6911.61 2550.7,6898.11 v1(2550.7,6886.61) ; v1(4711.81,7248.11) 4723.31,7248.11 J3.352@4736.81,7261.61
  S1(V) w4: v1(4178,7201) 4170,7209 4165.97,7209 4162,7205.03 4162,7178 4174,7166 4560,7166 cw(c4560,7144) 4560,7122 4230,7122 ccw(c4230,7112) 4230,7102 4314,7102 ; 4314.97,7102 4370,7102 cw(c4370,7085) 4387,7085 cw(c4367,7085) 4367,7065 4305,7065 ccw(c4305,7055) 4295,7055 ccw(c4305,7055) 4305,7045 4400,7045 ccw(c4400,7051) 4406,7051 4406,7075 cw(c4433,7075) 4433,7102 4566,7102 4634,7170 4708.03,7170 4720.12,7182.09 4720.12,7223.88 4711.81,7232.19 v1(4711.81,7248.11)
  S6(H) w4: v1(2550.7,6886.61) 2550.7,6902.52 2557.91,6909.73 2562.91,6909.73 2567.91,6904.73 2567.91,6867.09 2585,6850 2585,6825.03 2665.03,6745 3700,6745 ccw(c3700,6770) 3725,6770 ccw(c3700,6770) 3700,6795 3545,6795 cw(c3545,6805) 3535,6805 cw(c3545,6805) 3545,6815 3777,6815 ccw(c3777,6835) 3797,6835 ccw(c3775,6835) 3775,6857 3598,6857 cw(c3598,6865) 3590,6865 cw(c3600,6865) 3600,6875 3832,6875 ccw(c3832,6895) 3852,6895 ccw(c3830,6895) 3830,6917 3663,6917 cw(c3663,6925) 3655,6925 cw(c3665,6925) 3665,6935 3897,6935 ccw(c3897,6955) 3917,6955 ccw(c3895,6955) 3895,6977 3723,6977 cw(c3723,6985) 3715,6985 cw(c3725,6985) 3725,6995 3817,6995 ccw(c3817,7015) 3837,7015 ccw(c3820,7015) 3820,7032 3778,7032 cw(c3778,7040) 3770,7040 cw(c3780,7040) 3780,7050 3817,7050 ccw(c3817,7070) 3837,7070 ccw(c3820,7070) 3820,7087 3805,7087 cw(c3805,7092) 3800,7092 3800,7095 3828.73,7123.73 3828.73,7123.88 3913.85,7209 3980,7209 cw(c3980,7204) 3985,7204 3985,7187 ccw(c3990,7187) 3990,7182 ccw(c3990,7187) 3995,7187 3995,7200.04 cw(c4003.96,7200.04) 4003.96,7209 4034,7209 cw(c4034,7190) 4053,7190 4053,7130 ccw(c4075,7130) 4075,7108 ccw(c4075,7128) 4095,7128 4095,7200 cw(c4104,7200) 4104,7209 4170,7209 v1(4178,7201)
IL1.LR.G1.D4_N: J3.356 J4.236 | length 5775
  TOP w4: v1(2512.2,7098.11) 2523.7,7098.11 J4.236@2537.2,7111.61 ; J3.356@4736.81,7061.61 4750.31,7048.11 v1(4750.31,7036.61)
  BOT w4: v1(2512.2,7098.11) 2512.2,7072.8 2520,7065 2525,7065 2530,7070 2530,7115 2522,7123 2522,7223.97 2533,7234.97 2533,7389.97 2770.03,7627 3240,7627 3248,7635 3248,7714.97 3260.03,7727 3274.97,7727 3285,7716.97 3285,7632 3290,7627 3314.97,7627 3327,7614.97 3327,7600.03 3316.97,7590 2785,7590 2780,7585 2780,7580 2783,7577 3355,7577 3362.03,7569.97 ; 3362.03,7569.94 3367,7564.97 3367,7552 3355,7540 2785,7540 2780,7535 2780,7530 2783,7527 3475.03,7527 3571.65,7623.62 3571.65,7661.65 3595,7685 3643.94,7685 3981.94,7347 4433,7347 4464.97,7315.03 4721.94,7315.03 4740,7296.97 4743.51,7293.46 4743.51,7213.51 4740,7210 4733.61,7203.61 4733.61,7127.97 4741.61,7119.97 4741.61,7070 4750.31,7061.3 v1(4750.31,7036.61)
IL1.LR.G1.D4_P: J3.355 J4.235 | length 5771.9
  TOP w4: J4.235@2537.2,7061.61 2550.7,7048.11 v1(2550.7,7036.61) ; v1(4711.81,7098.11) 4723.31,7098.11 J3.355@4736.81,7111.61
  BOT w4: v1(2550.7,7036.61) 2550.7,7061.3 2542,7070 2542,7119.97 2534,7127.97 2534,7219 2545,7230 2545,7385 2710,7550 cw(c2713.54,7546.46) 2717.07,7550 2725.98,7541.09 ccw(c2729.51,7544.63) 2733.05,7541.09 ccw(c2729.51,7544.63) 2733.05,7548.16 2724.14,7557.07 cw(c2727.68,7560.61) 2724.14,7564.14 2775,7615 3244.97,7615 3260,7630.03 3260,7710 3265,7715 3270,7715 3273,7712 3273,7627.03 3285.03,7615 3310,7615 3315,7610 3315,7605 3312,7602 2780.03,7602 2768,7589.97 2768,7575.03 2778.03,7565 3350,7565 3355,7560 3355,7556.97 3350.03,7552 2780.03,7552 2768,7539.97 2768,7525.03 2778.03,7515 3480,7515 3583.65,7618.65 3583.65,7656.65 3600,7673 3638.97,7673 3976.97,7335 4428.03,7335 4460,7303.03 4716.97,7303.03 4731.51,7288.49 4731.51,7218.49 4721.61,7208.58 4721.61,7123 4729.61,7115 4729.61,7070 4724.61,7065 4719.61,7065 4711.81,7072.8 v1(4711.81,7098.11)
IL1.LR.G1.S_N: J3.359 J4.239 | length 5809.7
  TOP w4: v1(2512.2,7248.11) 2523.7,7248.11 J4.239@2537.2,7261.61 ; v1(4723.31,6936.61) 4723.31,6925.11 J3.359@4736.81,6911.61
  S2(H) w4: v1(2512.2,7248.11) 2512.2,7232.2 2505,7225 2500,7225 2495,7230 2495,7400 2510.54,7415.54 3582.49,7415.54 3599,7399.03 3599,7313.97 3595,7309.97 3590,7309.97 3585,7314.97 3585,7391.97 3573.49,7403.49 3572.97,7404 3552.03,7404 3551.51,7403.49 3546.51,7398.49 3543,7394.97 3543,7358 cw(c3538,7358) 3540,7353.42 cw(c3538,7358) 3538,7353 3525,7353 ccw(c3525,7348) 3520,7348 ccw(c3525,7348) 3525,7343 3535,7343 cw(c3535,7335) 3543,7335 3543,7330 cw(c3538,7330) 3538,7325 3525,7325 ccw(c3525,7320) 3520,7320 ccw(c3525,7320) 3525,7315 3535,7315 cw(c3535,7307) 3543,7307 3543,7300.03 3812.72,7030.31 ; 3812.81,7030.22 3812.81,7025.63 3806.18,7019 3801,7019 3502,7318 3502,7347 3525,7370 3525,7391.97 3513.49,7403.49 3509.97,7407 3495.03,7407 3483,7394.97 3483,7379.97 3468.03,7365 3450,7365 3447,7368 3447,7394.97 3434.97,7407 3420.03,7407 3416.51,7403.49 3408,7394.97 3408,7360.03 3814.03,6954 3850.03,6954 cw(c3850.03,6946.03) 3858,6946.03 3858,6925 ccw(c3875,6925) 3875,6908 ccw(c3875,6928) 3895,6928 3895,6949 cw(c3900,6949) 3900,6954 4078.03,6954 4095,6937.03 4095,6899 ccw(c4114,6899) 4114,6880 4135,6880 cw(c4135,6872) 4143,6872 4143,6845 ccw(c4165,6845) 4165,6823 ccw(c4165,6843) 4185,6843 4185,6877 cw(c4190,6877) 4190,6882 4202,6882 v1(4210,6874)
  S6(H) w4: v1(4210,6874) 4219,6883 4252,6883 ccw(c4252,6905) 4274,6905 4274,7005 cw(c4282,7005) 4282,7013 4285,7013 cw(c4285,7006) 4292,7006 4292,6892 ccw(c4311,6892) 4311,6873 ccw(c4311,6891) 4329,6891 4329,7024 4335,7030 ccw(c4320.86,7044.14) 4335,7058.28 ; 4336,7057.28 4332.91,7060.37 cw(c4336.46,7063.89) 4332.93,7067.43 4335.05,7069.55 cw(c4338.59,7066.01) 4342.11,7069.56 4347.67,7064 ; 4346.67,7065 ccw(c4358.33,7076.67) 4370,7065 4375,7070 ; 4374.62,7069.62 ccw(c4360.48,7083.76) 4374.99,7070.01 ; 4513.47,6936.5 4459.97,6883 4425.03,6883 cw(c4425.03,6898.03) 4410,6898.03 4410,6905 ccw(c4400,6905) 4400,6915 ccw(c4400,6907) 4392,6907 4392,6900 cw(c4375,6900) 4375,6883 4362.03,6883 cw(c4362.03,6898.03) 4347,6898.03 4347,7023.97 4415.03,7092 4502,7092 ccw(c4502,7100) 4510,7100 ccw(c4505,7100) 4505,7105 4460.03,7105 cw(c4460.03,7115.03) 4450,7115.03 4450,7135 ccw(c4445,7135) 4445,7140 4442,7140 ccw(c4442,7135) 4437,7135 4437,7122 cw(c4419,7122) 4419,7104 4386.91,7104 4380.72,7110.18 ccw(c4377.2,7106.63) 4373.67,7110.17 4371.55,7108.05 ccw(c4375.08,7104.51) 4371.53,7100.99 4374.62,7097.9 cw(c4360.48,7083.76) 4374.99,7070.01 ; 4513.49,6936.51 ccw(c4509.24,6940.76) 4515.24,6940.76 ccw(c4509.24,6940.76) 4513.49,6945 cw(c4520.56,6952.07) 4527.63,6959.14 ccw(c4531.87,6963.38) 4536.11,6959.14 ; 4536.13,6959.16 4557.97,6981 4708.94,6981 4723.31,6966.63 v1(4723.31,6936.61)
IL1.LR.G1.S_P: J3.358 J4.238 | length 5804.1
  TOP w4: J4.238@2537.2,7211.61 2550.7,7198.11 v1(2550.7,7186.61) ; J3.358@4736.81,6961.61 4750.31,6975.11 v1(4761.81,6975.11)
  S2(H) w4: v1(2550.7,7186.61) 2527.32,7210 2495,7210 2483,7222 2483,7404.97 2505.57,7427.54 3587.46,7427.54 3611,7404 3611,7308 3600.97,7297.97 3599.97,7297.97 3585.03,7297.97 3573,7310 3573,7387 3568,7392 3557,7392 3555,7390 3555,7305 3825,7035 3825,7020.85 3811.15,7007 3796.03,7007 3490,7313.03 3490,7351.97 3513,7374.97 3513,7387 3505,7395 3500,7395 3495,7390 3495,7375 3473,7353 3445.03,7353 3441.51,7356.51 3435,7363.03 3435,7390 3430,7395 3425,7395 3420,7390 3420,7365 3819,6966 3855,6966 cw(c3855,6951) 3870,6951 3870,6925 ccw(c3875,6925) 3875,6920 ccw(c3875,6928) 3883,6928 3883,6949 cw(c3900,6949) 3900,6966 4083,6966 4107,6942 4107,6899 ccw(c4114,6899) 4114,6892 4135,6892 cw(c4135,6872) 4155,6872 4155,6845 ccw(c4165,6845) 4165,6835 ccw(c4165,6843) 4173,6843 4173,6877 cw(c4190,6877) 4190,6894 4202,6894 v1(4210,6902)
  S6(H) w4: v1(4210,6902) 4217,6895 4252,6895 ccw(c4252,6905) 4262,6905 4262,7005 cw(c4282,7005) 4282,7025 4285,7025 cw(c4285,7006) 4304,7006 4304,6892 ccw(c4311,6892) 4311,6885 ccw(c4311,6891) 4317,6891 4317,7028.97 4326.51,7038.49 ccw(c4320.86,7044.14) 4326.52,7049.79 4324.42,7051.89 cw(c4336.46,7063.89) 4324.44,7075.91 4327.35,7078.82 cw(c4338.59,7067.59) 4349.8,7078.84 4350.58,7078.06 ccw(c4358.33,7085.9) 4366.13,7078.1 ccw(c4360.48,7083.76) 4366.14,7089.41 4363.78,7091.78 ; 4364,7117.46 ccw(c4377.49,7104.51) 4364.25,7091.31 ; 4365.18,7118.65 cw(c4377.2,7106.63) 4389.16,7118.72 4391.88,7116 4419,7116 ccw(c4419,7122) 4425,7122 4425,7135 cw(c4442,7135) 4442,7152 4445,7152 cw(c4445,7135) 4462,7135 4462,7120 ccw(c4465,7120) 4465,7117 4505,7117 cw(c4505,7100) 4522,7100 cw(c4502,7100) 4502,7080 4420,7080 4359,7019 4359,6903 ccw(c4367,6903) 4367,6895 4375,6895 ccw(c4375,6900) 4380,6900 4380,6907 cw(c4400,6907) 4400,6927 cw(c4400,6905) 4422,6905 4422,6903 ccw(c4430,6903) 4430,6895 4455,6895 4501.35,6941.35 cw(c4520.56,6952.07) 4531.28,6971.28 4553,6993 4713.91,6993 4725.95,6980.95 4731.8,6975.11 v1(4761.81,6975.11)
IL1.LR.G2.D0_N: J3.363 J4.243 | length 5845.8
  TOP w4: v1(2562.2,6948.11) 2573.7,6948.11 J4.243@2587.2,6961.61 ; J3.363@4686.81,7211.61 4700.31,7198.11 v1(4700.31,7186.61)
  S1(V) w4: v1(4133,7470) 4140.5,7462.5 4184.47,7462.5 4331.97,7315 4640,7315 4692,7263 4692,7228 4700.31,7219.69 v1(4700.31,7186.61)
  S5(V) w4: v1(2562.2,6948.11) 2585.59,6924.73 2617.91,6924.73 2629.91,6912.73 2629.91,6847.09 ccw(c2635,6847.09) 2635,6842 cw(c2635,6820) 2657,6820 cw(c2637,6820) 2637,6800 2485,6800 ccw(c2485,6792) 2477,6792 2477,6790 ccw(c2485,6790) 2485,6782 3560.03,6782 3570.03,6792 3570.03,6827 cw(c3587.03,6827) 3587.03,6844 cw(c3587.03,6827) 3604.03,6827 3604.03,6789.97 3612,6782 3620,6782 3630,6792 3630,6842 cw(c3647,6842) 3647,6859 cw(c3647,6842) 3664,6842 3664,6789.97 3671.97,6782 3687,6782 3701.49,6796.49 3701.49,7088.93 3707.56,7095 3711.07,7098.51 3726.01,7098.51 3729.53,7095 3734.56,7089.97 3734.56,6820 3739.56,6815 3745,6815 3750,6820 3750,7091.97 3756.51,7098.49 3760.03,7102 3774.97,7102 3778.49,7098.49 3783.49,7093.49 3787,7089.97 3787,6874.97 3792,6869.97 3797.44,6869.97 3803,6875.53 3803,6938 3823,6958 3865,6958 ccw(c3865,6963) 3870,6963 ccw(c3865,6963) 3865,6968 3825.03,6968 3821.51,6971.51 3807.71,6985.32 3807.71,7144.68 3813,7149.97 3858.03,7195 3858.03,7263.97 cw(c3876.06,7263.97) 3876.06,7282 3879,7282 cw(c3879,7265) 3896,7265 3896,7226 ; 3906,7225 3906,7320 cw(c3923,7320) 3923,7337 cw(c3923,7320) 3940,7320 3940,7220 ; 3906,7226 cw(c3901,7226) 3901,7221 cw(c3901,7226) 3896.01,7225.75 ; v1(4133,7470) 4125,7462 4065.03,7462 4038,7434.97 4038,7220 cw(c4033,7220) 4033,7215 cw(c4033,7220) 4028,7220 4028,7410 ccw(c4011,7410) 4011,7427 ccw(c4011,7410) 3994,7410 3994,7220 cw(c3989,7220) 3989,7215 cw(c3989,7220) 3984.01,7219.75 ; 3896.01,7225.75 cw(c3901,7226) 3896,7226 ; 3896,7225.75 3896,7226 ; 3940.01,7219.75 ccw(c3945,7220) 3945,7215 ccw(c3945,7220) 3950,7220 3950,7370 cw(c3967,7370) 3967,7387 cw(c3967,7370) 3984,7370 3984,7220 ; 3940.01,7219.75 cw(c3945,7220) 3940,7220 ; 3940,7219.75 3940,7220 ; 3984.01,7219.75 cw(c3989,7220) 3984,7220 ; 3984,7219.75 3984,7220
IL1.LR.G2.D0_P: J3.362 J4.242 | length 5841.3
  TOP w4: J4.242@2587.2,6911.61 2600.7,6898.11 v1(2600.7,6886.61) ; v1(4661.81,7248.11) 4673.31,7248.11 J3.362@4686.81,7261.61
  S1(V) w4: v1(4134,7443) 4141.5,7450.5 4179.5,7450.5 4327,7303 4635.03,7303 4680,7258.03 4680,7205 4675,7200 4665,7200 4661.81,7203.19 v1(4661.81,7248.11)
  S5(V) w4: v1(2600.7,6886.61) 2600.7,6902.52 2607.91,6909.73 2612.91,6909.73 2617.91,6904.73 2617.91,6847.09 ccw(c2635,6847.09) 2635,6830 cw(c2635,6820) 2645,6820 cw(c2637,6820) 2637,6812 2485,6812 ccw(c2485,6792) 2465,6792 2465,6790 ccw(c2485,6790) 2485,6770 3565,6770 3582.03,6787.03 3582.03,6827 cw(c3587.03,6827) 3587.03,6832 cw(c3587.03,6827) 3592.03,6827 3592.03,6783 3605.03,6770 3624.97,6770 3642,6787.03 3642,6842 cw(c3647,6842) 3647,6847 cw(c3647,6842) 3652,6842 3652,6783 3665,6770 3691.97,6770 3713.49,6791.51 3713.49,7083.96 3716.04,7086.51 3720.49,7086.51 3722.56,7084.44 3722.56,6815.03 3734.59,6803 3749.97,6803 3762,6815.03 3762,7087 3765,7090 3770,7090 3775,7085 3775,6870 3787.03,6857.97 3802.41,6857.97 3815,6870.56 3815,6933.03 3827.97,6946 3865,6946 ccw(c3865,6963) 3882,6963 ccw(c3865,6963) 3865,6980 3830,6980 3819.71,6990.29 3819.71,7139.71 3870.03,7190.03 3870.03,7265 cw(c3875.03,7265) 3875.03,7270 3880,7270 cw(c3880,7266) 3884,7266 3884,7226 ccw(c3901,7226) 3901,7209 ccw(c3901,7226) 3918,7226 ; 3918,7225 3918,7320 cw(c3923,7320) 3923,7325 cw(c3923,7320) 3928,7320 3928,7220 ccw(c3945,7220) 3945,7203 ccw(c3945,7220) 3962,7220 3962,7370 cw(c3967,7370) 3967,7375 cw(c3967,7370) 3972,7370 3972,7220 ; v1(4134,7443) 4131,7443 4124,7450 4070,7450 4050,7430 4050,7220 cw(c4033,7220) 4033,7203 cw(c4033,7220) 4016,7220 4016,7410 ccw(c4011,7410) 4011,7415 ccw(c4011,7410) 4006,7410 4006,7220 cw(c3989,7220) 3989,7203 cw(c3989,7220) 3972,7219.75 ; 3972,7219.75 cw(c3989,7220) 3972,7220 ; 3972,7219.75 3972,7220
IL1.LR.G2.D1_N: J3.366 J4.246 | length 5774.6
  TOP w4: v1(2562.2,7098.11) 2573.7,7098.11 J4.246@2587.2,7111.61 ; J3.366@4686.81,7061.61 4700.31,7048.11 v1(4700.31,7036.61)
  BOT w4: v1(2562.2,7098.11) 2562.2,7072.8 2570,7065 2575,7065 2580,7070 2580,7115 2572,7123 2572,7223.97 2583,7234.97 2583,7274.83 cw(c2589,7296) 2583,7317.17 2583,7353 2627.86,7397.86 cw(c2647.07,7408.59) 2662.63,7424.14 ccw(c2669.7,7431.21) 2679.7,7431.21 ccw(c2669.7,7431.21) 2676.77,7438.28 cw(c2692.33,7453.84) 2703.05,7473.05 2726,7496 3511,7496 3518,7503 3518,7534.97 3521.51,7538.49 3530.03,7547 3549.97,7547 3553.49,7543.49 3560,7536.97 3560,7500 3565,7495 3575,7495 3583,7503 3583,7599.97 3586.51,7603.49 3600.03,7617 3660,7617 cw(c3660,7600) 3677,7600 3677,7597 cw(c3660,7597) 3660,7580 3625,7580 ccw(c3625,7575) 3620,7575 3620,7572.43 ccw(c3625,7572.43) 3625,7567.43 3720,7567.43 cw(c3720,7550.43) 3737,7550.43 3737,7547.43 cw(c3720,7547.43) 3720,7530.43 3662.75,7530.43 3592.33,7460 2745,7460 ccw(c2745,7455) 2740,7455 ccw(c2745,7455) 2745,7450 3638,7450 ccw(c3638,7460) 3648,7460 3648,7496.97 3668.03,7517 3703.51,7517 cw(c3703.51,7511) 3709.51,7511 ccw(c3719.51,7511) 3729.51,7511 cw(c3735.51,7511) 3735.51,7517 3778,7517 3838.89,7456.11 cw(c3834.64,7451.87) 3840.64,7451.87 cw(c3834.64,7451.87) 3838.89,7447.63 ccw(c3845.96,7440.56) 3853.03,7433.49 cw(c3857.27,7429.24) 3861.51,7433.49 3947.12,7347.88 cw(c3942.88,7343.64) 3948.88,7343.64 cw(c3942.88,7343.64) 3947.12,7339.4 ccw(c3954.19,7332.33) 3961.24,7325.24 cw(c3965.5,7321.01) 3969.75,7325.25 3990.23,7304.77 cw(c4000.96,7285.56) 4020.17,7274.83 4026.71,7268.29 4050.29,7268.29 4053,7271 4053,7309.97 4065.03,7322 4084.97,7322 4100,7306.97 4100,7275 4105,7270 4110,7270 4113,7273 4113,7307.97 4126.54,7321.51 4141.49,7321.51 4155,7308 4155,7273 4168,7260 4216.09,7260 4225.09,7269 4262,7269 4315,7322 4364.97,7322 4377,7309.97 4377,7288 4380,7285 4387,7285 4390,7288 4390,7309.97 4402.03,7322 4414.97,7322 4427,7309.97 4427,7290 4430,7287 4671,7287 4693.51,7264.49 4693.51,7213.51 4690,7210 4684.6,7204.6 4684.6,7120.4 4691.61,7113.39 4691.61,7070 4700.31,7061.3 v1(4700.31,7036.61)
IL1.LR.G2.D1_P: J3.365 J4.245 | length 5774.4
  TOP w4: J4.245@2587.2,7061.61 2600.7,7048.11 v1(2600.7,7036.61) ; v1(4661.81,7098.11) 4673.31,7098.11 J3.365@4686.81,7111.61
  BOT w4: v1(2600.7,7036.61) 2600.7,7061.3 2592,7070 2592,7119.97 2584,7127.97 2584,7219 2595,7230 2595,7280 ccw(c2589,7280) 2589,7286 cw(c2589,7296) 2589,7306 ccw(c2589,7312) 2595,7312 2595,7348.03 2639.98,7393.01 ; 2640,7393.03 ccw(c2635.76,7397.27) 2641.76,7397.27 ccw(c2635.76,7397.27) 2640,7401.51 cw(c2647.07,7408.59) 2654.14,7415.66 ccw(c2669.7,7431.21) 2691.7,7431.21 ccw(c2669.7,7431.21) 2685.25,7446.77 cw(c2692.33,7453.84) 2699.4,7460.91 ccw(c2703.64,7465.15) 2707.88,7460.91 ; 2707.9,7460.93 2716.49,7469.51 2730.97,7484 3515.97,7484 3530,7498.03 3530,7530 3535,7535 3545,7535 3548,7532 3548,7495.03 3560.03,7483 3579.97,7483 3595,7498.03 3595,7595 3605,7605 3660,7605 cw(c3660,7600) 3665,7600 3665,7597 cw(c3660,7597) 3660,7592 3625,7592 ccw(c3625,7575) 3608,7575 3608,7572.43 ccw(c3625,7572.43) 3625,7555.43 3720,7555.43 cw(c3720,7550.43) 3725,7550.43 3725,7547.43 cw(c3720,7547.43) 3720,7542.43 3657.78,7542.43 3587.36,7472 2745,7472 ccw(c2745,7455) 2728,7455 ccw(c2745,7455) 2745,7438 3638,7438 ccw(c3638,7460) 3660,7460 3660,7492 3673,7505 3698.35,7505 ccw(c3719.51,7511) 3740.68,7505 3773.03,7505 3826.75,7451.28 ccw(c3845.96,7440.56) 3856.68,7421.35 3934.98,7343.05 ccw(c3954.19,7332.33) 3964.91,7313.12 3985.41,7292.62 ; 3985.42,7292.61 ccw(c3989.64,7296.87) 3993.89,7292.63 cw(c4000.96,7285.56) 4008.03,7278.49 ccw(c4012.27,7274.24) 4008.01,7270.02 4021.74,7256.29 4056.29,7256.29 4065,7265 4065,7305 4070,7310 4080,7310 4088,7302 4088,7267 4097,7258 4114.97,7258 4125,7268.03 4125,7303 4131.51,7309.51 4136.51,7309.51 4143,7303.03 4143,7268.03 4163.03,7248 4221.06,7248 4230.06,7257 4266.97,7257 4319.97,7310 4360,7310 4365,7305 4365,7283.03 4371.51,7276.51 4375.03,7273 4391.97,7273 4402,7283.03 4402,7305 4407,7310 4410,7310 4415,7305 4415,7285.03 4425.03,7275 4666.03,7275 4681.51,7259.51 4681.51,7218.49 4676.51,7213.49 4672.6,7209.57 4672.6,7155 cw(c4667.6,7155) 4667.6,7150 4655,7150 ccw(c4655,7145) 4650,7145 ccw(c4655,7145) 4655,7140 4667.6,7140 cw(c4667.6,7135) 4672.6,7135 4672.6,7115.43 4679.61,7108.42 4679.61,7070 4674.61,7065 4667,7065 4661.81,7070.19 v1(4661.81,7098.11)
IL1.LR.G2.D2_N: J3.369 J4.249 | length 5804.8
  TOP w4: v1(2562.2,7248.11) 2573.7,7248.11 J4.249@2587.2,7261.61 ; J3.369@4686.81,6911.61 4700.31,6898.11 v1(4700.31,6886.61)
  S1(V) w4: v1(2562.2,7248.11) 2562.2,7229.2 2558,7225 2550,7225 2545,7230 2545,7350 2568,7373 3357.85,7373 4017,6713.85 4017,6678 4032.76,6662.24 v1(4032.76,6650.93)
  S6(H) w4: v1(4032.76,6650.93) 4044.07,6650.93 4055,6640 4055,6630 4010,6585 4010,6426 ccw(c4027,6426) 4027,6409 4036,6409 ccw(c4036,6426) 4053,6426 4053,6575 cw(c4058,6575) 4058,6580 4061,6580 cw(c4061,6575) 4066,6575 4066,6426 ccw(c4083,6426) 4083,6409 4092,6409 ccw(c4092,6426) 4109,6426 4109,6575 cw(c4114,6575) 4114,6580 4117,6580 cw(c4117,6575) 4122,6575 4122,6426 ccw(c4139,6426) 4139,6409 4148,6409 ccw(c4148,6426) 4165,6426 4165,6575 cw(c4170,6575) 4170,6580 4173,6580 cw(c4173,6575) 4178,6575 4178,6426 ccw(c4195,6426) 4195,6409 4204,6409 ccw(c4204,6426) 4221,6426 4221,6575 cw(c4226,6575) 4226,6580 4229,6580 cw(c4229,6575) 4234,6575 4234,6426 ccw(c4251,6426) 4251,6409 4260,6409 ccw(c4260,6426) 4277,6426 4277,6575 cw(c4282,6575) 4282,6580 4285,6580 cw(c4285,6575) 4290,6575 4290,6426 ccw(c4307,6426) 4307,6409 4316,6409 ccw(c4316,6426) 4333,6426 4333,6580 cw(c4343,6580) 4343,6590 4516,6590 cw(c4516,6585) 4521,6585 4521,6436 ccw(c4538,6436) 4538,6419 4544,6419 ccw(c4544,6436) 4561,6436 4561,6585 cw(c4566,6585) 4566,6590 4569,6590 cw(c4569,6585) 4574,6585 4574,6436 ccw(c4591,6436) 4591,6419 4600,6419 ccw(c4600,6436) 4617,6436 4617,6580.03 4692,6655.03 4692,6853 4682.12,6862.88 4682.12,6934.12 4688,6940 4695,6940 4700.31,6934.69 v1(4700.31,6886.61)
IL1.LR.G2.D2_P: J3.368 J4.248 | length 5812.2
  TOP w4: J4.248@2587.2,7211.61 2600.7,7198.11 v1(2600.7,7186.61) ; v1(4661.81,6948.11) 4673.31,6948.11 J3.368@4686.81,6961.61
  S1(V) w4: v1(2600.7,7186.61) 2600.7,7197.3 2588,7210 2545,7210 2533,7222 2533,7354.97 2563.03,7385 3362.82,7385 4029,6718.82 4029,6682.97 4041.24,6670.73 v1(4052.56,6670.73)
  S6(H) w4: v1(4052.56,6670.73) 4052.56,6659.41 4067,6644.97 4067,6625.03 4022,6580.03 4022,6426 ccw(c4027,6426) 4027,6421 4036,6421 ccw(c4036,6426) 4041,6426 4041,6575 cw(c4058,6575) 4058,6592 4061,6592 cw(c4061,6575) 4078,6575 4078,6426 ccw(c4083,6426) 4083,6421 4092,6421 ccw(c4092,6426) 4097,6426 4097,6575 cw(c4114,6575) 4114,6592 4117,6592 cw(c4117,6575) 4134,6575 4134,6426 ccw(c4139,6426) 4139,6421 4148,6421 ccw(c4148,6426) 4153,6426 4153,6575 cw(c4170,6575) 4170,6592 4173,6592 cw(c4173,6575) 4190,6575 4190,6426 ccw(c4195,6426) 4195,6421 4204,6421 ccw(c4204,6426) 4209,6426 4209,6575 cw(c4226,6575) 4226,6592 4229,6592 cw(c4229,6575) 4246,6575 4246,6426 ccw(c4251,6426) 4251,6421 4260,6421 ccw(c4260,6426) 4265,6426 4265,6575 cw(c4282,6575) 4282,6592 4285,6592 cw(c4285,6575) 4302,6575 4302,6426 ccw(c4307,6426) 4307,6421 4316,6421 ccw(c4316,6426) 4321,6426 4321,6585 cw(c4338,6585) 4338,6602 4516,6602 cw(c4516,6585) 4533,6585 4533,6436 ccw(c4538,6436) 4538,6431 4544,6431 ccw(c4544,6436) 4549,6436 4549,6585 cw(c4566,6585) 4566,6602 4569,6602 cw(c4569,6585) 4586,6585 4586,6436 ccw(c4591,6436) 4591,6431 4600,6431 ccw(c4600,6436) 4605,6436 4605,6585 4680,6660 4680,6848.03 4670.12,6857.91 4670.12,6906.73 4661.81,6915.04 v1(4661.81,6948.11)
IL1.LR.G2.D3_N: J3.373 J4.253 | length 5811.1
  TOP w4: v1(2612.2,6948.11) 2623.7,6948.11 J4.253@2637.2,6961.61 ; J3.373@4636.81,7211.61 4650.31,7198.11 v1(4650.31,7186.61)
  S1(V) w4: v1(4210,7305.61) 4220.61,7305.61 4233,7318 4233,7332 4212,7353 4185.03,7353 4168,7370.03 4168,7403 4175.03,7410.03 4203,7410.03 4335.03,7278 4623.97,7278 4642,7259.97 4642,7228 4649.81,7220.19 4649.81,7187.11 v1(4650.31,7186.61)
  S6(H) w4: v1(2612.2,6948.11) 2612.2,6929.8 ccw(c2617,6929.8) 2617,6925 2625,6925 ccw(c2625,6930) 2630,6930 2630,6960 ccw(c2625,6960) 2625,6965 1902,6965 cw(c1902,6985) 1882,6985 cw(c1904,6985) 1904,7007 1962,7007 ccw(c1962,7020) 1975,7020 1975,7142 cw(c2000,7142) 2000,7167 cw(c2000,7145) 2022,7145 2022,7073 ccw(c2030,7073) 2030,7065 ccw(c2030,7075) 2040,7075 2040,7147 cw(c2060,7147) 2060,7167 cw(c2060,7145) 2082,7145 2082,7073 ccw(c2090,7073) 2090,7065 ccw(c2090,7075) 2100,7075 2100,7147 cw(c2120,7147) 2120,7167 cw(c2120,7145) 2142,7145 2142,7068 2152,7058 2152,7030 ccw(c2175,7030) 2175,7007 2855,7007 cw(c2855,6990) 2872,6990 cw(c2855,6990) 2855,6973 2700,6973 ccw(c2700,6963) 2690,6963 2690,6905.09 2679.91,6895 2679.91,6877.06 2689.85,6867.12 2724.97,6867.12 cw(c2724.97,6845.09) 2747,6845.09 2747,6815.03 cw(c2729.97,6815.03) 2729.97,6798 2702,6798 2640,6860 2634.04,6860 ccw(c2634.04,6850.96) 2625,6850.96 2625,6835.94 2678.94,6782 3435.94,6782 3792.73,7138.79 3898.94,7245 3930.94,7277 3950,7277 cw(c3950,7260) 3967,7260 3967,7248 ccw(c3970,7248) 3970,7245 ccw(c3970,7250) 3975,7250 3975,7260 cw(c3992,7260) 3992,7277 3995,7277 cw(c3995,7260) 4012,7260 4012,7250 ccw(c4017,7250) 4017,7245 4020,7245 ccw(c4020,7250) 4025,7250 4025,7254.61 cw(c4035,7254.61) 4035,7264.61 4180.83,7264.61 4210,7293.78 v1(4210,7305.61)